# Altium PCB DS130-1.01-B G-M传感器.PcbDoc
Units mm, origin at the board's own origin, x right, y up, seen from the top; angles counter-clockwise.
Board outline 41 x 64 mm, 2 copper layers (Top Layer, Bottom Layer), stack 1.581 mm thick; 36 components, 40 nets, 119 pads, 20 vias.
Unrouted connection lines stored in the file: 5.
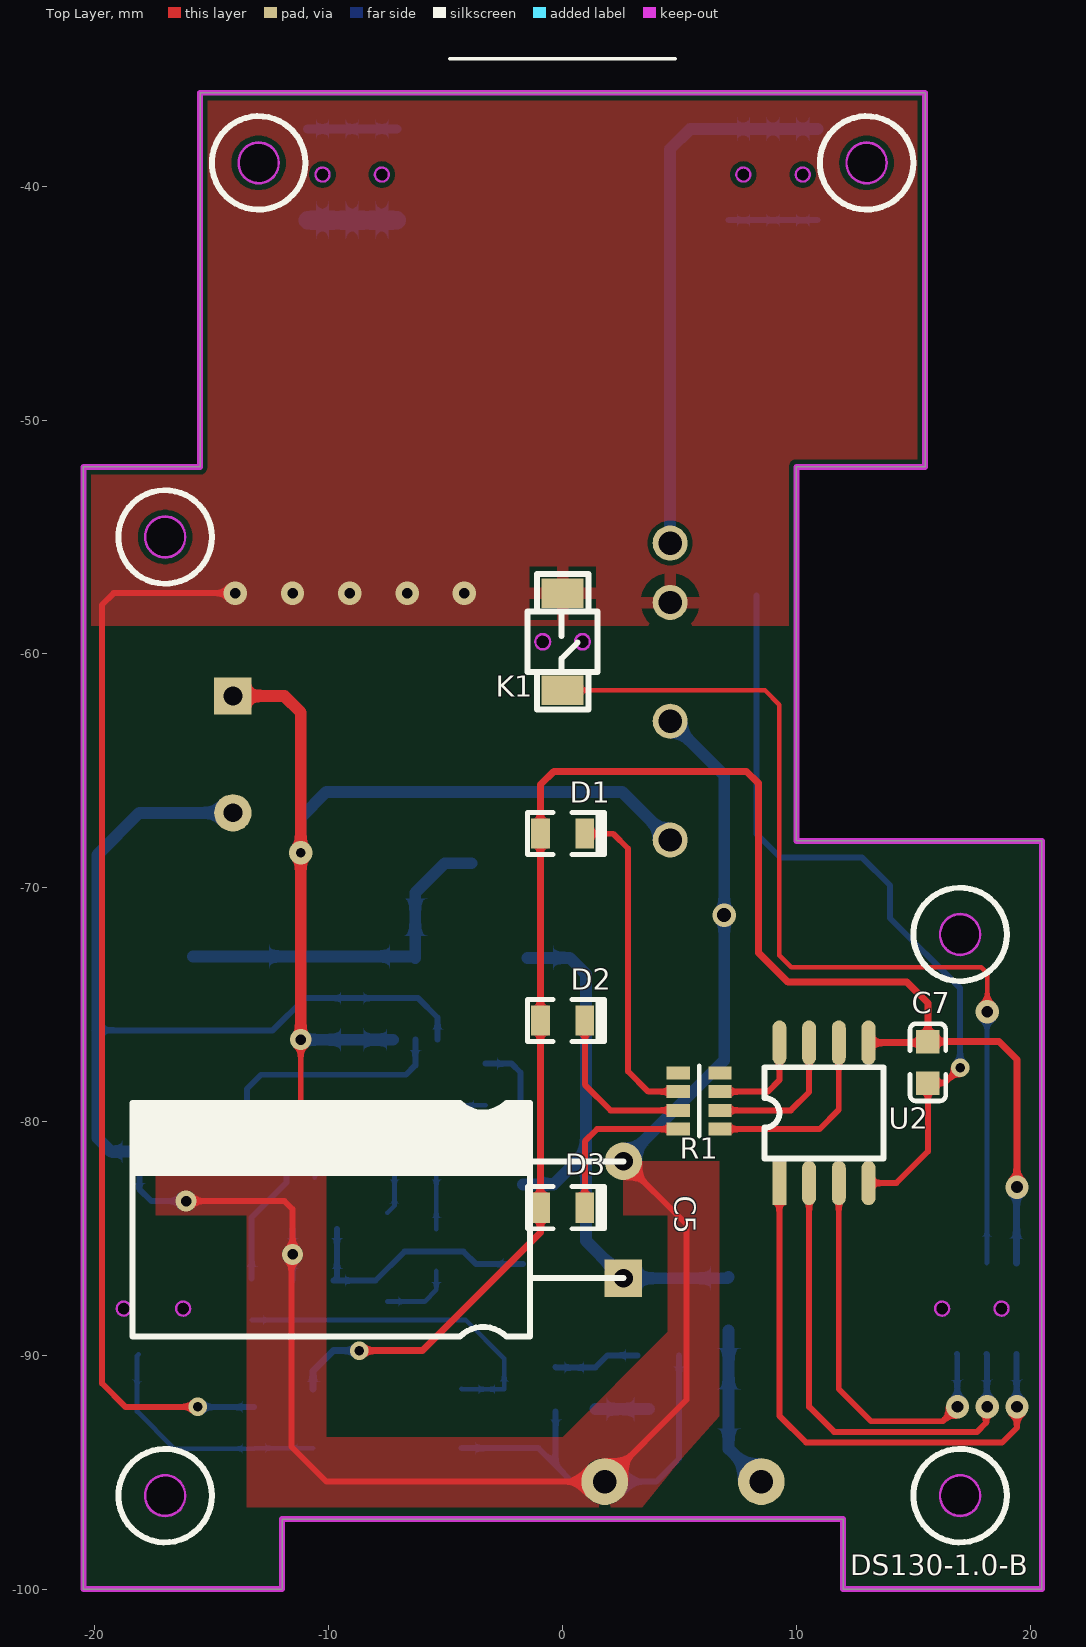
[diagram p0: Top Layer view]
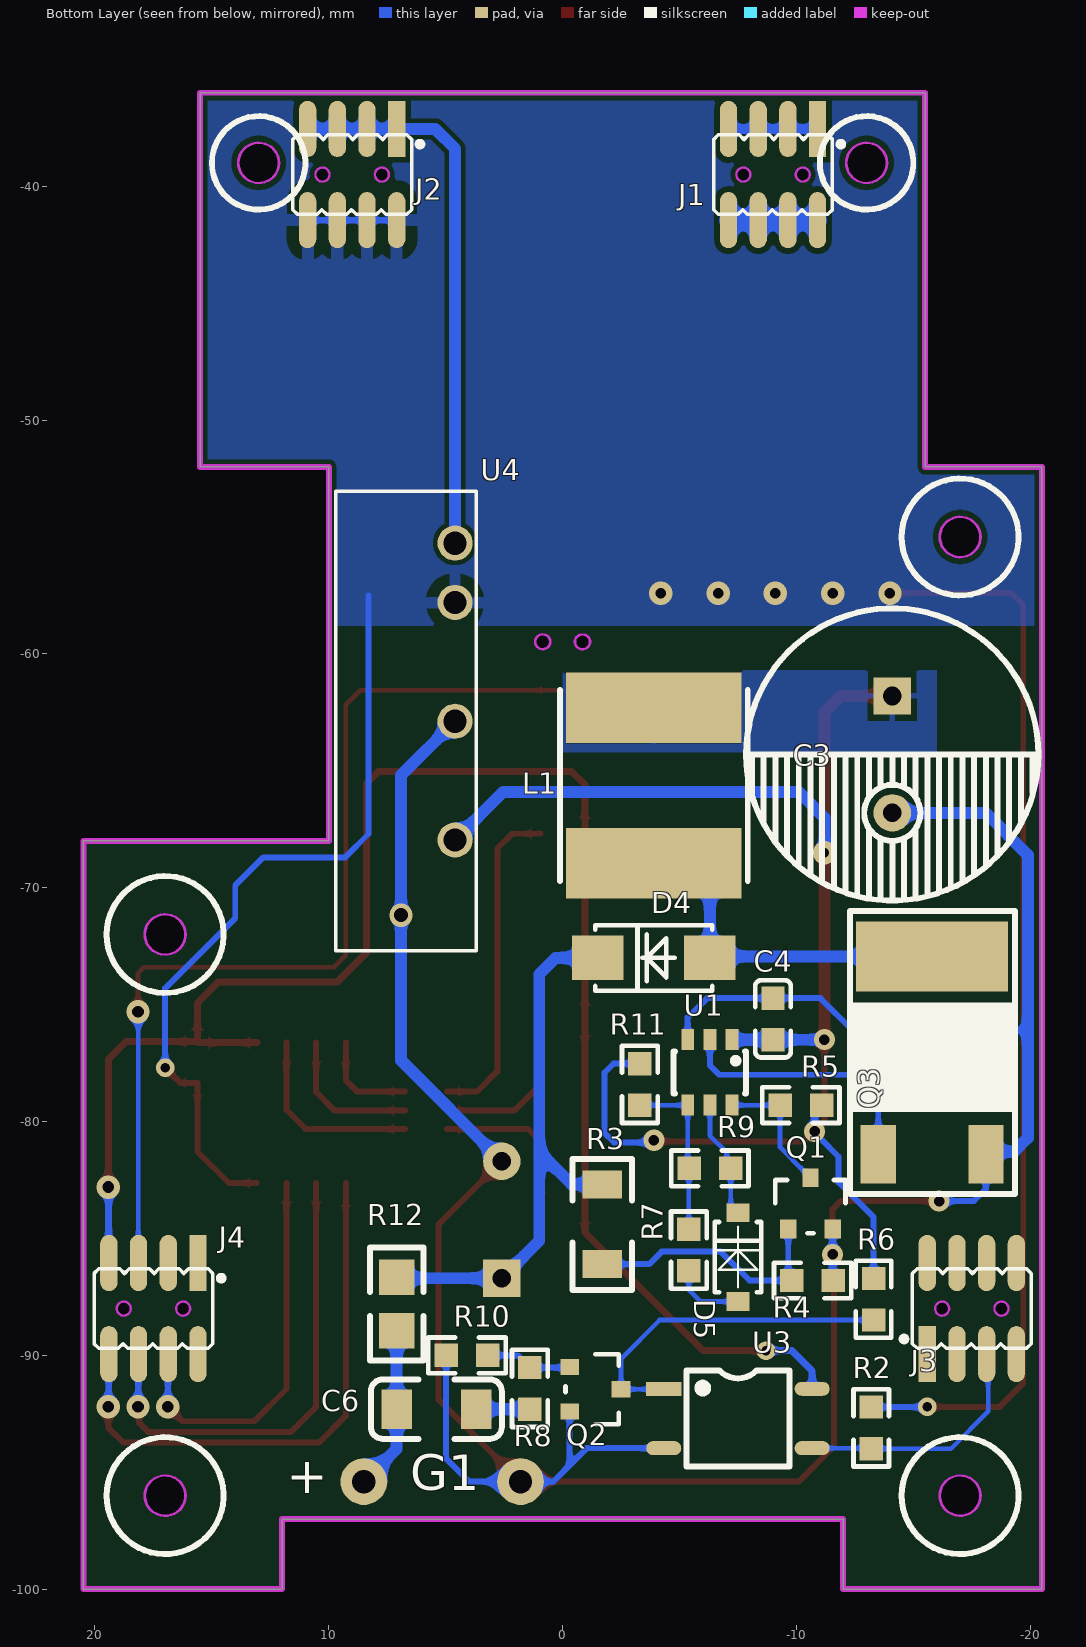
[diagram p1: Bottom Layer view, seen from below]
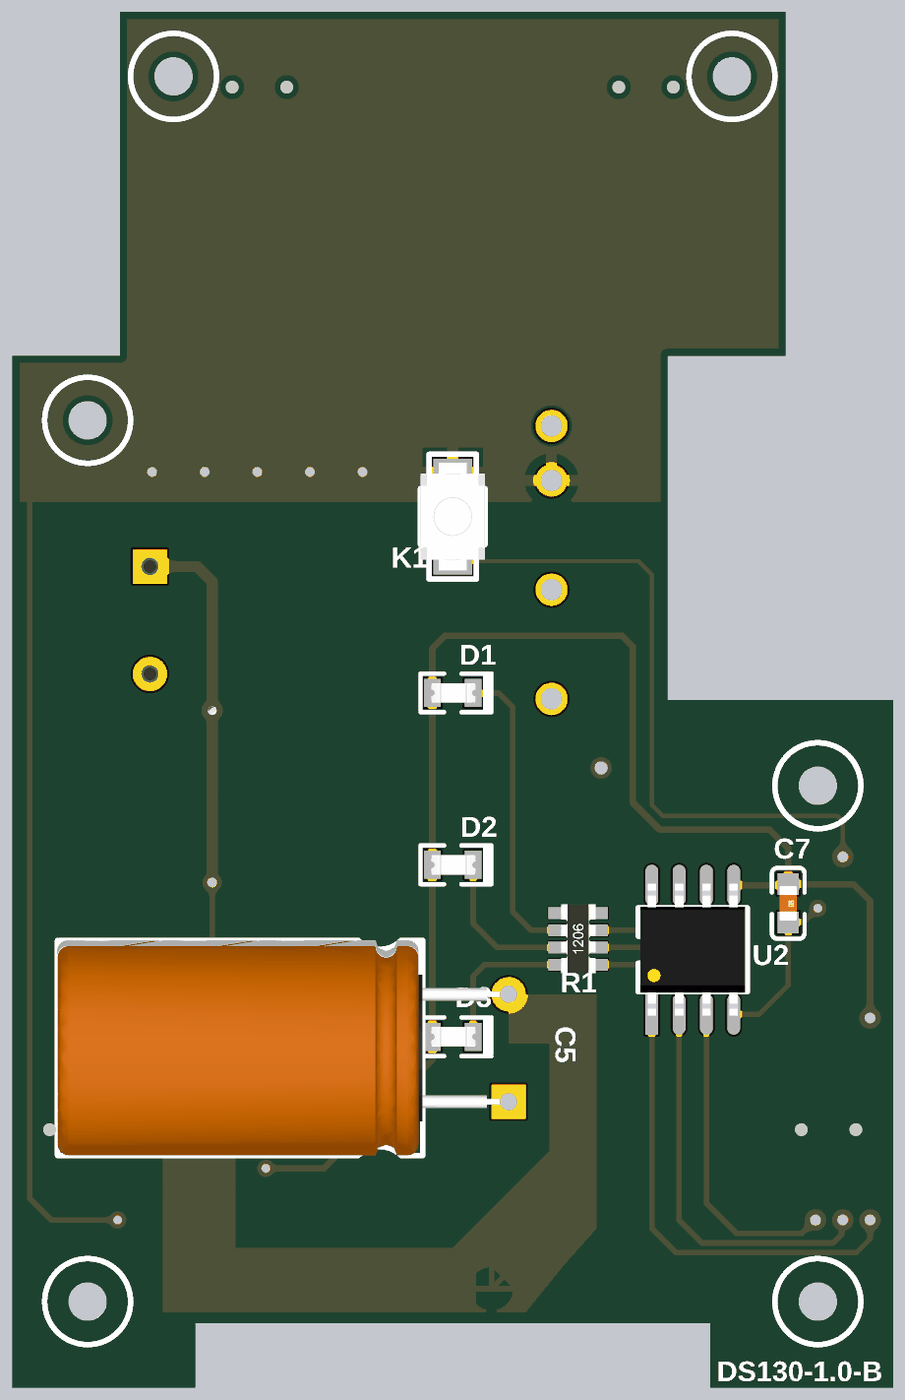
[diagram p2: 3D render of the assembled board from above, using the file's embedded part models]
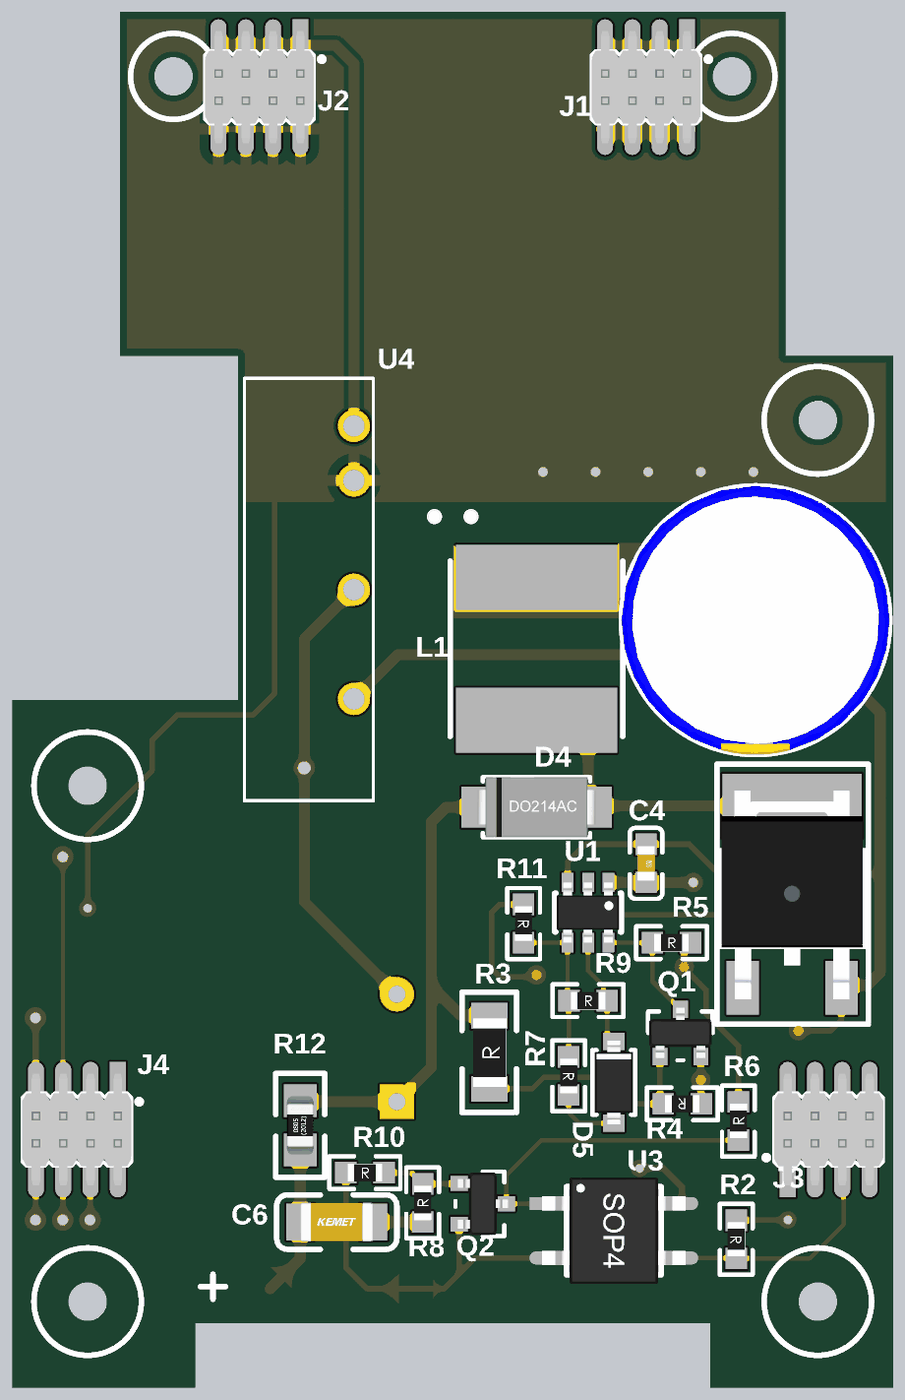
[diagram p3: 3D render of the assembled board from below, using the file's embedded part models]

## Layer stack, top to bottom
Top Solder: solder mask 0.0102, Solder Resist, Dk 3.5
Top Layer: signal copper 0.0356
Dielectric 1: dielectric 1.51, FR-4, Dk 4.8
Bottom Layer: signal copper 0.0356
Bottom Solder: solder mask 0.0102, Solder Resist, Dk 3.5

## Board outline
-20.5,-100 -20.5,-52 -15.5,-52 -15.5,-36 15.5,-36 15.5,-52 10,-52 10,-68 20.5,-68 20.5,-100 12,-100 12,-97 -12,-97 -12,-100
cut-out: -17.9,-96 ccw(c-17,-96) -17,-96.9 ccw(c-17,-96) -16.1,-96 ccw(c-17,-96) -17,-95.1 ccw(c-17,-96)
cut-out: 16.1,-96 ccw(c17,-96) 17,-96.9 ccw(c17,-96) 17.9,-96 ccw(c17,-96) 17,-95.1 ccw(c17,-96)
cut-out: 16.1,-72 ccw(c17,-72) 17,-72.9 ccw(c17,-72) 17.9,-72 ccw(c17,-72) 17,-71.1 ccw(c17,-72)
cut-out: -17.9,-55 ccw(c-17,-55) -17,-55.9 ccw(c-17,-55) -16.1,-55 ccw(c-17,-55) -17,-54.1 ccw(c-17,-55)
cut-out: 12.1,-39 ccw(c13,-39) 13,-39.9 ccw(c13,-39) 13.9,-39 ccw(c13,-39) 13,-38.1 ccw(c13,-39)
cut-out: -13.9,-39 ccw(c-13,-39) -13,-39.9 ccw(c-13,-39) -12.1,-39 ccw(c-13,-39) -13,-38.1 ccw(c-13,-39)

## Design rules (kind name [scope] priority, off if disabled: settings)
Clearance [All] p1: gap=0.2 ignorepadtopadclearanceinfootprint=FALSE except(0: Arc-Hole Track-Hole SMDPad-Hole THPad-Hole Via-Hole Fill-Hole Poly-Hole Region-Hole Text-Hole; 0.15: SMDPad-SMDPad; 0.254: SMDPad-Via SMDPad-Fill SMDPad-Poly SMDPad-Region THPad-THPad THPad-Via THPad-Text Via-Via Via-Fill Via-Poly Via-Region Via-Text Fill-Fill Fill-Poly Fill-Region Fill-Text Poly-Poly Poly-Region Poly-Text Region-Region Region-Text Text-Text)
MinimumSolderMaskSliver [All] p1: minsoldermaskwidth=0.2
PlaneConnect [All] p1: planeconnectstyle=Relief reliefexpansion=0.508 reliefentries=4 reliefconductorwidth=0.254 reliefairgap=0.508
PolygonConnect [InNet('GND') vs InNet('GND')] p1: thpad.connectstyle=Relief thpad.reliefconductorwidth=0.508 thpad.reliefentries=4 thpad.polygonreliefangle="90 Angle" thpad.airgapwidth=0.508 smdpad.connectstyle=Relief smdpad.reliefconductorwidth=0.508 smdpad.reliefentries=4 smdpad.polygonreliefangle="90 Angle" smdpad.airgapwidth=0.508 via.connectstyle=Direct via.reliefconductorwidth=0.254 via.reliefentries=4 via.polygonreliefangle="45 Angle" via.airgapwidth=0.254
RoutingVias [All] p1: holewidth=0.6 width=1 viastyle="Through Hole" minholewidth=0.4 minwidth=0.8 maxholewidth=1 maxwidth=2
SilkToSilkClearance [All] p1: silktosilkclearance=0.1
SilkToSolderMaskClearance [IsPad] p1: minsilkscreentomaskgap=0.05 clearancetoexposedcopper=TRUE
SolderMaskExpansion [All] p1: expansion=0.102 istentingtop=FALSE
Width [All] p1: maxlimit=1 minlimit=0.2 preferedwidth=0.2
26 further rules are at their usual default settings.

## Components (designator, comment, footprint, x,y, rotation, side; value= is the part's Value field where it differs from the comment)
C3 "E-Cap_2200uF/25V ±20％ 13*21mm DIP2" E-Cap_Ф12.5mm_5mm_DIP -14.1,-64.3 r180 bottom value=2200uF
C4 "SMDCAP00013" 0603CAP -9,-75.61 r270 bottom value=100nF
C5 "E-Cap_10uF/450V ±20％ 4*7mm DIP2" E-Cap_Ф10mm_5mm_16mm_DIP 2.6,-84.2 r180 top value=10uF
C6 "MLCC 47pF 1kV ±5％ 1206" 1206CAP 5.4,-92.3 r180 bottom value=47pF
C7 "SMDCAP00013" 0603CAP 15.621,-77.47 r270 top value=100nF
D1 "SMDLED00010" LED_0805 0,-67.68 r0 top locked value=BLUE
D2 "SMDLED00003" LED_0805 0,-75.68 r0 top locked value=RED
D3 "Chip 翠绿LED 0805" LED_0805 0,-83.68 r0 top locked value=GREEN
D4 "US1M-DO-214AC" SMA/DO-214AC -3.9,-73 r0 bottom value=US1M
D5 "DIPDIODE02001" SOD-123 -7.5,-85.8 r90 bottom value=1N4148
G1 "M4011盖革管" M4011-90 30.121,-120.4 r0 bottom
J1 "X1321WVS-2x04J-C40D53" X1321WVS-2X04J-C40D53 -9,-39.5 r0 bottom locked value=2*4P
J2 "X1321WVS-2x04J-C40D53" X1321WVS-2X04J-C40D53 9,-39.5 r0 bottom locked value=2*4P
J3 "X1321WVS-2x04J-C40D53" X1321WVS-2X04J-C40D53 -17.5,-88 r180 bottom locked value=2*4P
J4 "X1321WVS-2x04J-C40D53" X1321WVS-2X04J-C40D53 17.5,-88 r0 bottom locked value=2*4P
K1 "TS-1185-B-A-A-A" KEY_TS-1185-X-A-A-A 0,-59.48 r270 top locked
L1 "SMD_220uH 8.0*8.0" IND-SMD_L8.0-W8.0 -3.807,-65.741 r270 bottom value=220uH
Q1 "MMBTA44" SOT23 -10.6,-83.5 r180 bottom value=MMBTA44-400V
Q2 "MMBT3904" SOT23 -1.4,-91.45 r270 bottom value=MMBT3904-40V
Q3 "XKT-1050" TO-252 -15.8,-78.4 r270 bottom
R1 "SMDRES05003" 0603RES_PACK4 5.842,-79.121 r180 top value=510R
R2 "Chip 4.7K 1/16W ±1％ 0603" 0603RES -13.2,-93.1 r270 bottom value=4.7K
R3 "Chip 4.7M 1/4W ±1％ 1206 500V" 1206RES -1.7,-84.4 r90 bottom value=4.7M
R4 "Chip 6.49K 1/8W ±1％ 0603" 0603RES -10.689,-86.8 r0 bottom value=6.49K
R5 "SMDRES00058" 0603RES -10.189,-79.3 r180 bottom value=20K
R6 "SMDRES00042" 0603RES -13.3,-87.6 r90 bottom value=2K
R7 "SMDRES00058" 0603RES -5.4,-85.5 r270 bottom value=20K
R8 "SMDRES00108" 0603RES 1.4,-91.411 r90 bottom value=22K
R9 "SMDRES00085" 0603RES -6.3,-82 r180 bottom value=1M
R10 "SMDRES00071" 0603RES 4.089,-90 r180 bottom value=100K
R11 "SMDRES00075" 0603RES -3.3,-78.411 r270 bottom value=200K
R12 "Chip 1M 1/10W ±1％ 0805 400V" 0805RES 7.1,-87.8 r90 bottom value=1M
U1 "XKT-203" SOT23-6 -6.3,-77.9 r0 bottom
U2 "SMDIC000018" SO-8 11.176,-79.629 r90 top value=ULN2001
U3 "EL357N" SO-4 -7.5,-92.7 r180 bottom
U4 "IF0505S-1WR3" IF0505S-1WR3 4.6,-55.26 r270 bottom locked

## Footprints (in the part's own frame and the unit in brackets; to place one, negate y for a bottom-side part, rotate by r counter-clockwise, add the part's x,y. Pads: shape width x height; smd on the part's side, far side on the other; paste and mask are expansions set on the pad)
0603CAP [mm]
  rect 1x1 smd: 1(-0.889,0) 2(0.89,0)
  silkscreen extent -1.65,-0.76 1.65,0.76, body extent -0.8,-0.4 0.8,0.4, height 0.3
0603RES [mm]
  rect 1x1 smd: 1(-0.889,0) 2(0.889,0)
  silkscreen extent -1.65,-0.76 1.65,0.76, body extent -0.8,-0.41 0.8,0.41, height 0.51
0603RES_PACK4 [mm]
  rect 1x0.55 smd mask+0.05: 1(-0.889,1.2) 2(-0.889,0.4) 3(-0.889,-0.4) 4(-0.889,-1.2) 5(0.889,-1.2) 6(0.889,-0.4) 7(0.889,0.4) 8(0.889,1.2)
  silkscreen extent 0,-1.5 0,1.5, body extent -0.8,-1.6 0.8,1.6, height 0.5
0805RES [mil]
  rect 60x60 smd: 1(-45,0) 2(45,0)
  silkscreen extent -95,-45 95,45, body extent -55,-25 55,25, height 32
1206CAP [mm]
  rect 1.3x1.7 smd: 1(-1.7,0) 2(1.7,0)
  silkscreen extent -2.8,-1.27 2.8,1.27, body extent -1.7,-0.9 1.7,0.9, height 1.8
1206RES [mm]
  rect 1.2x1.7 smd: 1(-1.7,0) 2(1.7,0)
  silkscreen extent -2.8,-1.27 2.8,1.27, body extent -1.6,-0.8 1.57,0.75, height 0.61
E-Cap_Ф10mm_5mm_16mm_DIP [mm]
  rect 1.6x1.6 hole 0.8: 1(0,2.5)
  round 1.6 hole 0.8: 2(0,-2.5)
  silkscreen extent 0,-5 21,5, body extent 1,-5.01 21.01,5, height 10
E-Cap_Ф12.5mm_5mm_DIP [mm]
  rect 1.6x1.6 hole 0.8: 1(0,2.5)
  round 1.6 hole 0.8: 2(0,-2.5)
  silkscreen extent -6.25,-6.25 6.25,6.25, body extent -6.25,-6.26 6.25,6.25, height 20.02
IF0505S-1WR3 [mm]
  round 1.5 hole 1: 1(0,0) 2(2.54,0) 4(7.62,0) 6(12.7,0)
  silkscreen extent -2.21,-5.1 17.44,0.9, body extent -2.26,-5.1 17.44,0.9, height 10.16
IND-SMD_L8.0-W8.0 [mm]
  rect 3.024x7.5 smd: 1(3.215,0.093) 2(-3.441,0.093)
  silkscreen extent -4.19,-3.93 3.96,4.11
KEY_TS-1185-X-A-A-A [mm]
  rect 1.25x1.8 smd: 1(-2.075,0) 2(2.075,0)
  Keep-Out Layer board cut-out: 0.35,-0.85 0.323,-0.716 0.247,-0.603 0.134,-0.527 0,-0.5 0,-0.5 -0.134,-0.527 -0.247,-0.603 -0.323,-0.716 -0.35,-0.85 -0.35,-0.85 -0.323,-0.984 -0.247,-1.097 -0.134,-1.173 0,-1.2 0,-1.2 0.134,-1.173 0.247,-1.097 0.323,-0.984 0.35,-0.85
  Keep-Out Layer board cut-out: -0.35,0.85 -0.323,0.716 -0.247,0.603 -0.134,0.527 0,0.5 0,0.5 0.134,0.527 0.247,0.603 0.323,0.716 0.35,0.85 0.35,0.85 0.323,0.984 0.247,1.097 0.134,1.173 0,1.2 0,1.2 -0.134,1.173 -0.247,1.097 -0.323,0.984 -0.35,0.85
  silkscreen extent -2.9,-1.5 2.9,1.5, body extent -2.5,-1.5 2.5,1.5, height 2
LED_0805 [mm]
  rect 0.8x1.3 smd: 1(-0.95,0) 2(0.95,0)
  silkscreen extent -1.5,-0.9 1.8,0.9, body extent -1,-0.45 1.06,0.45, height 0.85
M4011-90 [mm]
  round 2 hole 1 paste+0 mask+0.102: 1(-28.321,-25) 2(-21.621,-25)
SMA/DO-214AC [mm]
  rect 2.2x1.9 smd: 1(-2.4,0) 2(2.4,0)
  silkscreen extent -2.5,-1.4 2.5,1.4, body extent -2.74,-1.4 2.74,1.4, height 2.28
SO-4 [mm]
  rect 1.5x0.6 smd mask+0: 1(-3.175,1.27)
  oval 1.5x0.6 smd mask+0: 2(-3.175,-1.27) 3(3.175,-1.27) 4(3.175,1.27)
  silkscreen extent -2.2,-2.05 2.2,2.05, body extent -3.34,-2.47 3.34,2.48, height 2.9
SO-8 [mm]
  rect 1.9x0.6 smd: 1(-3,1.905)
  oval 1.9x0.6 smd: 2(-3,0.635) 3(-3,-0.635) 4(-3,-1.905) 5(3,-1.905) 6(3,-0.635) 7(3,0.635) 8(3,1.905)
  silkscreen extent -1.95,-2.54 1.95,2.54, body extent -3.07,-2.44 3.07,2.44, height 1.77
SOD-123 [mm]
  rect 0.8x1 smd: 1(-1.9,0) 2(1.9,0)
  silkscreen extent -1.5,-1 1.5,1, body extent -1.95,-0.9 1.95,0.9, height 1.18
SOT23 [mm]
  rect 0.7x0.8 smd: 1(-0.95,-1.1) 2(0.95,-1.1) 3(0,1.1)
  silkscreen extent -1.5,-1.27 1.5,1, body extent -1.46,-1.17 1.46,1.17, height 1
SOT23-6 [mm] "SOT-23/SC-74A; 5 Leads; Body 3.1 x 3 mm, inc. leads (LxW max)"
  rect 0.55x0.9 smd: 1(-0.95,-1.4) 2(0,-1.4) 3(0.95,-1.4) 4(0.95,1.4) 5(0,1.4) 6(-0.95,1.4)
  silkscreen extent -1.55,-0.9 1.55,0.9, body extent -1.45,-1.4 1.45,1.4, height 1.45
TO-252 [mm]
  rect 2.5x1.5 smd: 1(3,-2.3) 3(3,2.3)
  rect 3x6.5 smd: 2(-5.46,0)
  silkscreen extent -7.4,-3.5 4.7,3.55, body extent -6.17,-3.29 3.53,3.29, height 2.3
X1321WVS-2X04J-C40D53 [mm]
  rect 0.74x2.4 smd: 1(-1.905,-1.95)
  oval 0.74x2.4 smd: 2(-1.905,1.95) 3(-0.635,-1.95) 4(-0.635,1.95) 5(0.635,-1.95) 6(0.635,1.95) 7(1.905,-1.95) 8(1.905,1.95)
  Keep-Out Layer board cut-out: 1.57,0 1.547,0.115 1.482,0.212 1.385,0.277 1.27,0.3 1.27,0.3 1.155,0.277 1.058,0.212 0.993,0.115 0.97,0 0.97,0 0.993,-0.115 1.058,-0.212 1.155,-0.277 1.27,-0.3 1.27,-0.3 1.385,-0.277 1.482,-0.212 1.547,-0.115 1.57,0
  Keep-Out Layer board cut-out: -1.57,0 -1.547,-0.115 -1.482,-0.212 -1.385,-0.277 -1.27,-0.3 -1.27,-0.3 -1.155,-0.277 -1.058,-0.212 -0.993,-0.115 -0.97,0 -0.97,0 -0.993,0.115 -1.058,0.212 -1.155,0.277 -1.27,0.3 -1.27,0.3 -1.385,0.277 -1.482,0.212 -1.547,0.115 -1.57,0
  Keep-Out Layer circle w0.1: c-1.27,0 r0.3
  Keep-Out Layer circle w0.1: c1.27,0 r0.3
  silkscreen extent -3,-1.7 2.54,1.7, body extent -2.54,-2.6 2.54,2.6, height 5.5

## Part data
C3 C5: "插件铝电解电容"
C4 C7: library part "MLCC 100nF 50V ±10％ 0603", "贴片电容"
C6: "贴片电容"
D1: library part "Chip 蓝色LED 0805", "贴片LED"
D2: library part "Chip 红色LED 0805", "贴片LED"
D3: "贴片LED"
D4: "快恢复/高效率二极管"
D5: library part 1N4148W, "贴片开关二极管 T4"
J1 J2 J3 J4: "双排针2x4P 立贴 1.27mm"
K1: "轻触开关"
Q1 Q2: "BJT"
Q3: "NMOS"
R1: library part "Chip R*4 510R 1/16W ±5％ 0603", "贴片排阻"
R2 R3 R4 R12: "贴片电阻"
R5 R7: library part "Chip 20K 1/16W ±1％ 0603", "贴片电阻"
R6: library part "Chip 2K 1/16W ±1％ 0603", "贴片电阻"
R8: library part "Chip 22K 1/16W ±1％ 0603", "贴片电阻"
R9: library part "Chip 1M 1/16W ±1％ 0603", "贴片电阻"
R10: library part "Chip 100K 1/16W ±1％ 0603", "贴片电阻"
R11: library part "Chip 200K 1/16W ±1％ 0603", "贴片电阻"
U2: library part "ULN2001 SOP-8", "电机驱动芯片"
U3: "光耦"

## Via types
v1: diameter 0.9, hole 0.45, Top Layer to Bottom Layer, tented both sides, 5 vias
v2: diameter 1, hole 0.45, Top Layer to Bottom Layer, tented both sides, 5 vias
v3: diameter 1, hole 0.5, Top Layer to Bottom Layer, tented both sides, 5 vias
v4: diameter 0.8, hole 0.4, Top Layer to Bottom Layer, tented both sides, 3 vias
v5: diameter 1, hole 0.4, Top Layer to Bottom Layer, tented both sides, 1 vias
v6: diameter 1, hole 0.6, Top Layer to Bottom Layer, tented both sides, 1 vias

## Nets (pads, with @x,y where several pads share a name; then routed paths per layer and width w, separated by ;. In a path a pad name is that pad's centre, name@x,y a point inside that pad or via, vN(x,y) a via of type N, cw(c..) or ccw(c..) an arc to the next point about the centre after c; other vN are vias at no path point)
ADC0: J3.8
ADC1: J4.2
DAC_OUT: J3.6
Dis1_red_EN: J4.4 U2.3 | length 17
  Top Layer w0.254: U2.3 11.811,-91.44 13.189,-92.818 16.261,-92.818 16.877,-92.202 v3(16.891,-92.202)
  Bottom Layer w0.254: J4.4 16.878,-89.963 16.878,-92.189 v3(16.891,-92.202)
Dis2_green_EN: J4.6 U2.2 | length 20.7
  Top Layer w0.254: U2.2 10.541,-92.202 11.611,-93.272 17.726,-93.272 18.11,-92.888 18.11,-92.253 v3(18.161,-92.202)
  Bottom Layer w0.254: J4.6 18.148,-89.963 18.148,-92.189 v3(18.161,-92.202)
Dis3_blue_EN: J4.8 U2.1 | length 24
  Top Layer w0.254: U2.1 9.271,-92.583 10.414,-93.726 18.796,-93.726 19.431,-93.091 v3(19.431,-92.202)
  Bottom Layer w0.254: J4.8 19.418,-89.963 19.418,-92.189 v3(19.431,-92.202)
GND: C7.2 J2.2 J2.4 J2.6 J2.8 K1.1 R2.1 U2.4 U4.2 | length 83.5
  Top Layer w0.254: v4(-15.6,-92.2) -18.7,-92.2 -19.7,-91.2 -19.7,-57.9 -19.2,-57.4 v2(-14,-57.4) ; U2.4 14.271,-82.629 15.621,-81.279 C7.2 15.634,-78.347 16.353,-78.347 v4(17,-77.7)
  Bottom Layer w0.254: v4(-15.6,-92.2) -15.589,-92.211 R2.1 ; J2.2 J2.4 J2.6 J2.8 ; 8.3,-57.5 8.3,-67.7 9.3,-68.7 12.8,-68.7 14,-69.9 14,-71.3 17,-74.3 v4(17,-77.7)
  other v2: -11.55,-57.4 -9.1,-57.4 -6.65,-57.4 -4.2,-57.4
Ground: C3.2 C4.1 C5.2 G1.1 Q1.2 Q2.2 Q3.3 R4.1 R10.1 U1.3 U3.2 U4.4 | length 126.8
  Top Layer w0.254: v1(-16.1,-83.4) -11.9,-83.4 -11.55,-83.75 v1(-11.55,-85.686) -11.6,-85.736 -11.6,-93.9 -10.1,-95.4 G1.1 5.3,-91.9 5.3,-84.4 C5.2
  Bottom Layer w0.254: -19.9,-76.1 -12.4,-76.1 -11.021,-74.721 C4.1 -6.179,-74.721 -5.35,-75.55 U1.3 ; Q3.3 -18.1,-82.891 -17.591,-83.4 v1(-16.1,-83.4) ; R4.1 -11.55,-86.772 v1(-11.55,-85.686) Q1.2 ; U3.2 -1.03,-93.97 -0.3,-94.7 ; Q2.2 -0.3,-94.7 ; R10.1 4.978,-94.422 4,-95.4 G1.1 0.4,-95.4 -0.3,-94.7
  Bottom Layer w0.508: Q3.3 -18.214,-81.286 -19.314,-81.286 -19.9,-80.7 -19.9,-76.1 -19.9,-68.6 -18.1,-66.8 C3.2 ; C5.2 6.911,-77.389 v6(6.911,-71.173) 6.911,-65.191 U4.4
I2C1_SCL: J4.1
I2C1_SDA: J4.3
IS_5V: C3.1 C4.2 L1.2 R5.2 R6.2 R11.1 U1.1 U4.6 | length 65.6
  Top Layer w0.254: v1(-11.2,-76.5) -11.2,-80 v1(-10.778,-80.422) -10.728,-80.422 -10.306,-80.845 -3.945,-80.845 v1(-3.9,-80.8)
  Top Layer w0.508: C3.1 -11.9,-61.8 -11.2,-62.5 v5(-11.2,-68.5) v1(-11.2,-76.5)
  Bottom Layer w0.254: R6.2 -13.3,-84.1 -11.8,-82.6 -11.8,-81.5 -11.078,-80.778 ; R5.2 -10.778,-79.6 v1(-10.778,-80.422) ; v1(-3.9,-80.8) -3.8,-80.9 -2.2,-80.9 -1.8,-80.5 -1.8,-77.9 -2.178,-77.522 R11.1
  Bottom Layer w0.508: v1(-11.2,-76.5) C4.2 U1.1 ; v5(-11.2,-68.5) -11.2,-67 -10.1,-65.9 2.54,-65.9 U4.6
IS_400V: C5.1 D4.2 R3.2 R12.2 | length 24.3
  Bottom Layer w0.508: R3.2 -1.686,-82.686 -0.386,-82.686 1,-81.3 ; D4.2 0.3,-73 1,-73.7 1,-81.3 ; R12.2 7.057,-86.7 C5.1 1,-85.1 1,-81.3
KEY_HOME: J4.5 K1.2 | length 41.9
  Top Layer w0.2: K1.2 8.655,-61.555 9.271,-62.171 9.271,-72.898 9.779,-73.406 17.907,-73.406 18.161,-73.66 v3(18.161,-75.311)
  Bottom Layer w0.2: J4.5 18.148,-86.037 18.148,-75.324 v3(18.161,-75.311)
LED_blue: D1.2 R1.6 | length 14.2
  Top Layer w0.254: D1.2 0.961,-67.691 2.159,-67.691 2.794,-68.326 2.794,-77.851 3.664,-78.721 R1.6
LED_green: D3.2 R1.8 | length 7.1
  Top Layer w0.254: D3.2 0.95,-80.85 1.479,-80.321 R1.8
LED_red: D2.2 R1.7 | length 7.2
  Top Layer w0.254: D2.2 0.95,-78.42 2.051,-79.521 R1.7
NetC6_1: C6.1 G1.2 R12.1 | length 7
  Bottom Layer w0.508: R12.1 C6.1 7.1,-94 G1.2
NetC6_2: C6.2 R8.1 | length 2.3
  Bottom Layer w0.508: R8.1 C6.2
NetD4_1: D4.1 L1.1 Q3.2 | length 15.2
  Bottom Layer w0.508: Q3.2 -6.36,-72.94 D4.1 -6.3,-70.214 -5.042,-68.956 L1.1
NetD5_1: D5.1 R7.2 | length 3.1
  Bottom Layer w0.2: D5.1 -5.9,-87.7 -5.4,-87.2 R7.2
NetD5_2: D5.2 R9.2 U1.5 | length 5.1
  Bottom Layer w0.2: D5.2 -7.489,-83.9 -7.189,-83.6 R9.2 -7.017,-81.828 -7.017,-81.317 -6.3,-80.6 U1.5
NetQ1_1: Q1.1 R3.1 R4.2 | length 11.1
  Bottom Layer w0.254: Q1.1 -9.65,-86.65 R4.2 -8,-86.8 -6.762,-85.562 -4.238,-85.562 -3.7,-86.1 R3.1
NetQ1_3: Q1.3 R5.1 U1.6 | length 5.7
  Bottom Layer w0.2: Q1.3 -10.6,-82.35 -10.35,-82.1 -10.3,-82.1 -9.3,-81.1 R5.1 U1.6
NetQ2_1: Q2.1 R8.2 R10.2 | length 3.7
  Bottom Layer w0.254: Q2.1 -0.278,-90.522 R8.2 1.922,-90 R10.2
NetQ2_3: Q2.3 R6.1 U3.1 | length 14.6
  Bottom Layer w0.2: R6.1 -4.147,-88.489 -2.5,-90.136 Q2.3 -4.305,-91.45 U3.1
NetQ3_1: Q3.1 U1.2 | length 11.5
  Bottom Layer w0.254: Q3.1 -13.5,-78.6 -12.9,-78 -6.7,-78 -6.3,-77.6 U1.2
NetR1_1: R1.1 U2.6 | length 8.3
  Top Layer w0.254: R1.1 10.992,-80.321 11.811,-79.502 U2.6
NetR1_2: R1.2 U2.7 | length 6.2
  Top Layer w0.254: R1.2 9.76,-79.521 10.541,-78.74 U2.7
NetR1_3: R1.3 U2.8 | length 4.3
  Top Layer w0.254: R1.3 8.782,-78.721 9.271,-78.232 U2.8
NetR7_1: R7.1 R9.1 R11.2 U1.4 | length 7.4
  Bottom Layer w0.2: R7.1 -5.4,-82.011 -5.35,-81.961 U1.4 R11.2
SPI1/SPI2_CS: J3.4
SPI2_MISO: J3.1
SPI2_MOSI: J3.3
SPI2_SCK: J3.2
USART2_RXD: J3.5 R2.2 U3.3 | length 10.7
  Bottom Layer w0.2: J3.5 -18.2,-90.015 -18.2,-92.4 -16.611,-93.989 R2.2 -13.181,-93.97 U3.3
USART2_TXD: J3.7
VBUS: J1.2 J1.4 J1.6 J1.8 | length 3.8
  Bottom Layer w0.8: J1.2 J1.4 J1.6 J1.8
VCC_3V3_MCU: C7.1 D1.1 D2.1 D3.1 J4.7 U2.5 U3.4 | length 74.2
  Top Layer w0.3: v4(-8.7,-89.8) -6,-89.8 -0.95,-84.75 D2.1 D1.1 -0.95,-65.593 -0.378,-65.021 7.871,-65.021 8.382,-65.532 8.382,-72.782 9.641,-74.041 14.732,-74.041 15.621,-74.93 C7.1 18.669,-76.581 19.431,-77.343 v3(19.431,-82.804) ; U2.5 C7.1@15.573,-76.629
  Bottom Layer w0.3: U3.4 -10.675,-90.675 -9.8,-89.8 v4(-8.7,-89.8) ; J4.7 19.418,-86.037 19.418,-82.817 v3(19.431,-82.804)
VCC_5V: J2.1 J2.3 J2.5 J2.7 U4.1 | length 23.5
  Bottom Layer w0.508: U4.1 4.6,-38.4 5.45,-37.55 J2.1 J2.3 J2.5 J2.7
VSS: J1.1 J1.3 J1.5 J1.7 | length 3.8
  Bottom Layer w0.4: J1.1 J1.3 J1.5 J1.7
pads on no net: R1.4 R1.5

## Polygon pours and split planes (outlines as drawn)
GND on Bottom Layer "GND_L02_P004" (solid, remove dead copper, pour order 4): -20.5,-58.8 -20.5,-52 -15.5,-52 -15.5,-36 15.5,-36 15.5,-52 10,-52 10,-58.8
IS_5V on Bottom Layer "IS_5V_L02_P001" (solid, remove dead copper, pour order 1): 0,-60.7 -16,-60.7 -16,-64.2 0,-64.2
Ground on Top Layer "GROUND_L01_P005" (solid, remove dead copper, pour order 5): 2.6,-81.7 6.7,-81.7 6.7,-92.6 5.1,-94.4 3.4,-96.5 -13.5,-96.5 -13.5,-84 -17.4,-84 -17.4,-82.3 -10.1,-82.3 -10.1,-93.5 0,-93.5 4.5,-89 4.5,-84 2.6,-84
GND on Top Layer "GND_L01_P003" (solid, remove dead copper, pour order 3): -20.5,-58.8 -20.5,-52 -15.5,-52 -15.5,-36 15.5,-36 15.5,-52 10,-52 10,-58.8

## Keep-outs
Keep-Out Layer:
  circle w0.1: c-0.851,-59.487 r0.316
  circle w0.1: c0.85,-59.481 r0.316
  circle w0.1: c17,-96 r0.86
  circle w0.1: c-17,-96 r0.86
  circle w0.1: c-17,-55 r0.86
  circle w0.1: c17,-72 r0.86
  circle w0.1: c13,-39 r0.86
  circle w0.1: c-13,-39 r0.86
  lines w0.254: -20.5,-100 -20.5,-52 -15.5,-52 -15.5,-36 15.5,-36 15.5,-52 10,-52 10,-68 20.5,-68 20.5,-100 12,-100 12,-97 -12,-97 -12,-100 -20.5,-100

## Silkscreen, mask and mechanical layers (free items; w line width, h text height)
Top Overlay:
  circle w0.254: c13,-39 r2
  circle w0.254: c-13,-39 r2
  circle w0.254: c-17,-55 r2
  circle w0.254: c17,-72 r2
  circle w0.254: c17,-96 r2
  circle w0.254: c-17,-96 r2
  lines w0.15: -4.826,-34.55 4.826,-34.55 -4.826,-34.55
  text "DS130-1.0-B" at 12.3,-99.7 h1.5
Bottom Overlay:
  circle w0.254: c13,-39 r2
  circle w0.254: c-13,-39 r2
  circle w0.254: c-17,-55 r2.5
  circle w0.254: c17,-72 r2.5
  circle w0.254: c17,-96 r2.5
  circle w0.254: c-17,-96 r2.5
  text "+" at 10.054,-95.9 h1.52
Mechanical 1:
  circle w0.254: c-17,-96 r0.9
  circle w0.254: c17,-96 r0.9
  circle w0.254: c-17,-55 r0.9
  circle w0.254: c13,-39 r0.9
  circle w0.254: c-13,-39 r0.9
  circle w0.254: c17,-72 r0.9
  lines w0.254: -20.5,-100 -20.5,-52 -15.5,-52 -15.5,-36 15.5,-36 15.5,-52 10,-52 10,-68 20.5,-68 20.5,-100 12,-100 12,-97 -12,-97 -12,-100 -20.5,-100
Mechanical 15:
  circle w0.254: c0,-67.68 r0.6
  circle w0.254: c0,-59.48 r1.5
  circle w0.254: c0,-75.68 r0.6
  circle w0.254: c0,-83.68 r0.6
  lines w0.15: -4.485,-36 -4.485,-44.41 4.485,-44.41 4.485,-36
  lines w0.508: -16,-51 16,-51